# Altium PCB ESP32_FINAL.PcbDoc
Units mil, origin at the board's own origin, x right, y up, seen from the top; angles counter-clockwise.
Board outline 2385 x 3020 mil, 2 copper layers (Top Layer, Bottom Layer); 30 components, 35 nets, 122 pads, 7 vias.
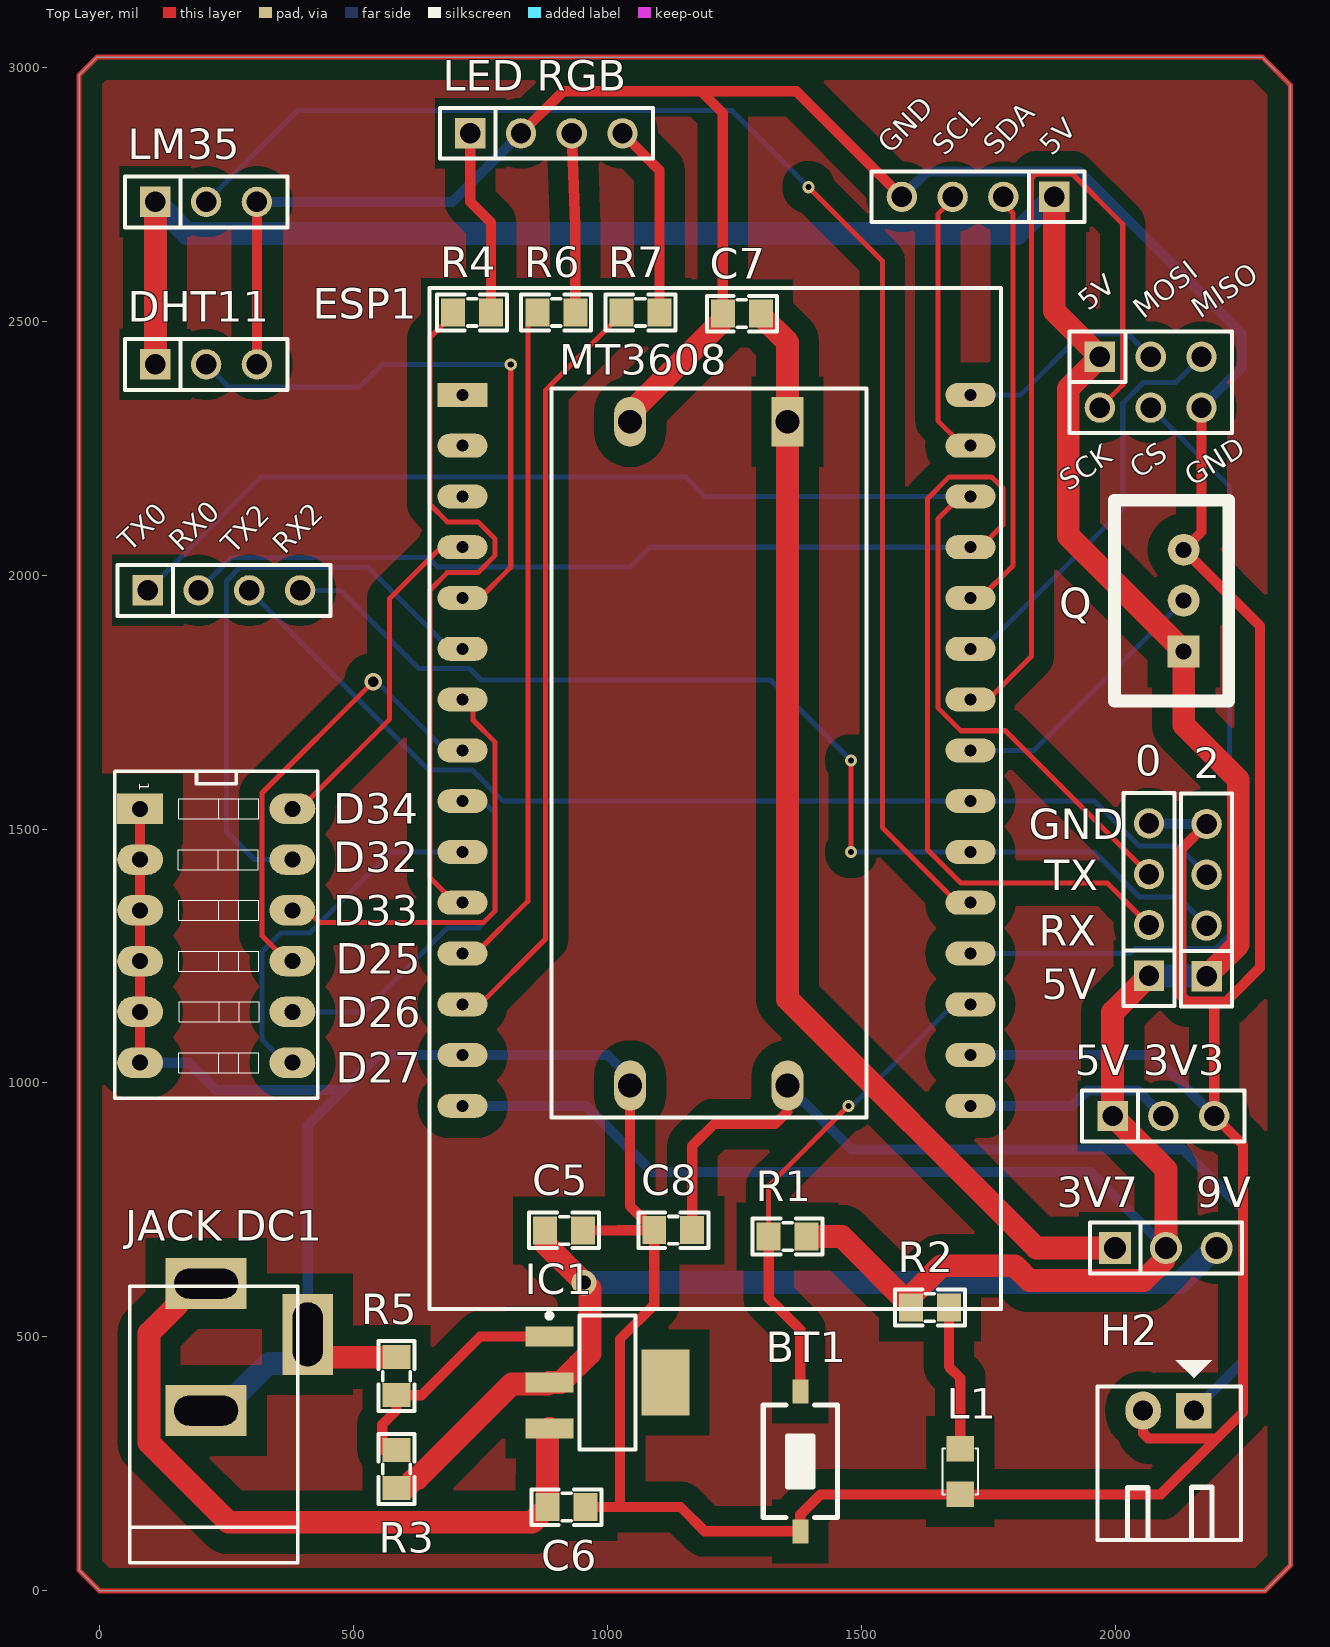
[diagram p0: Top Layer view]
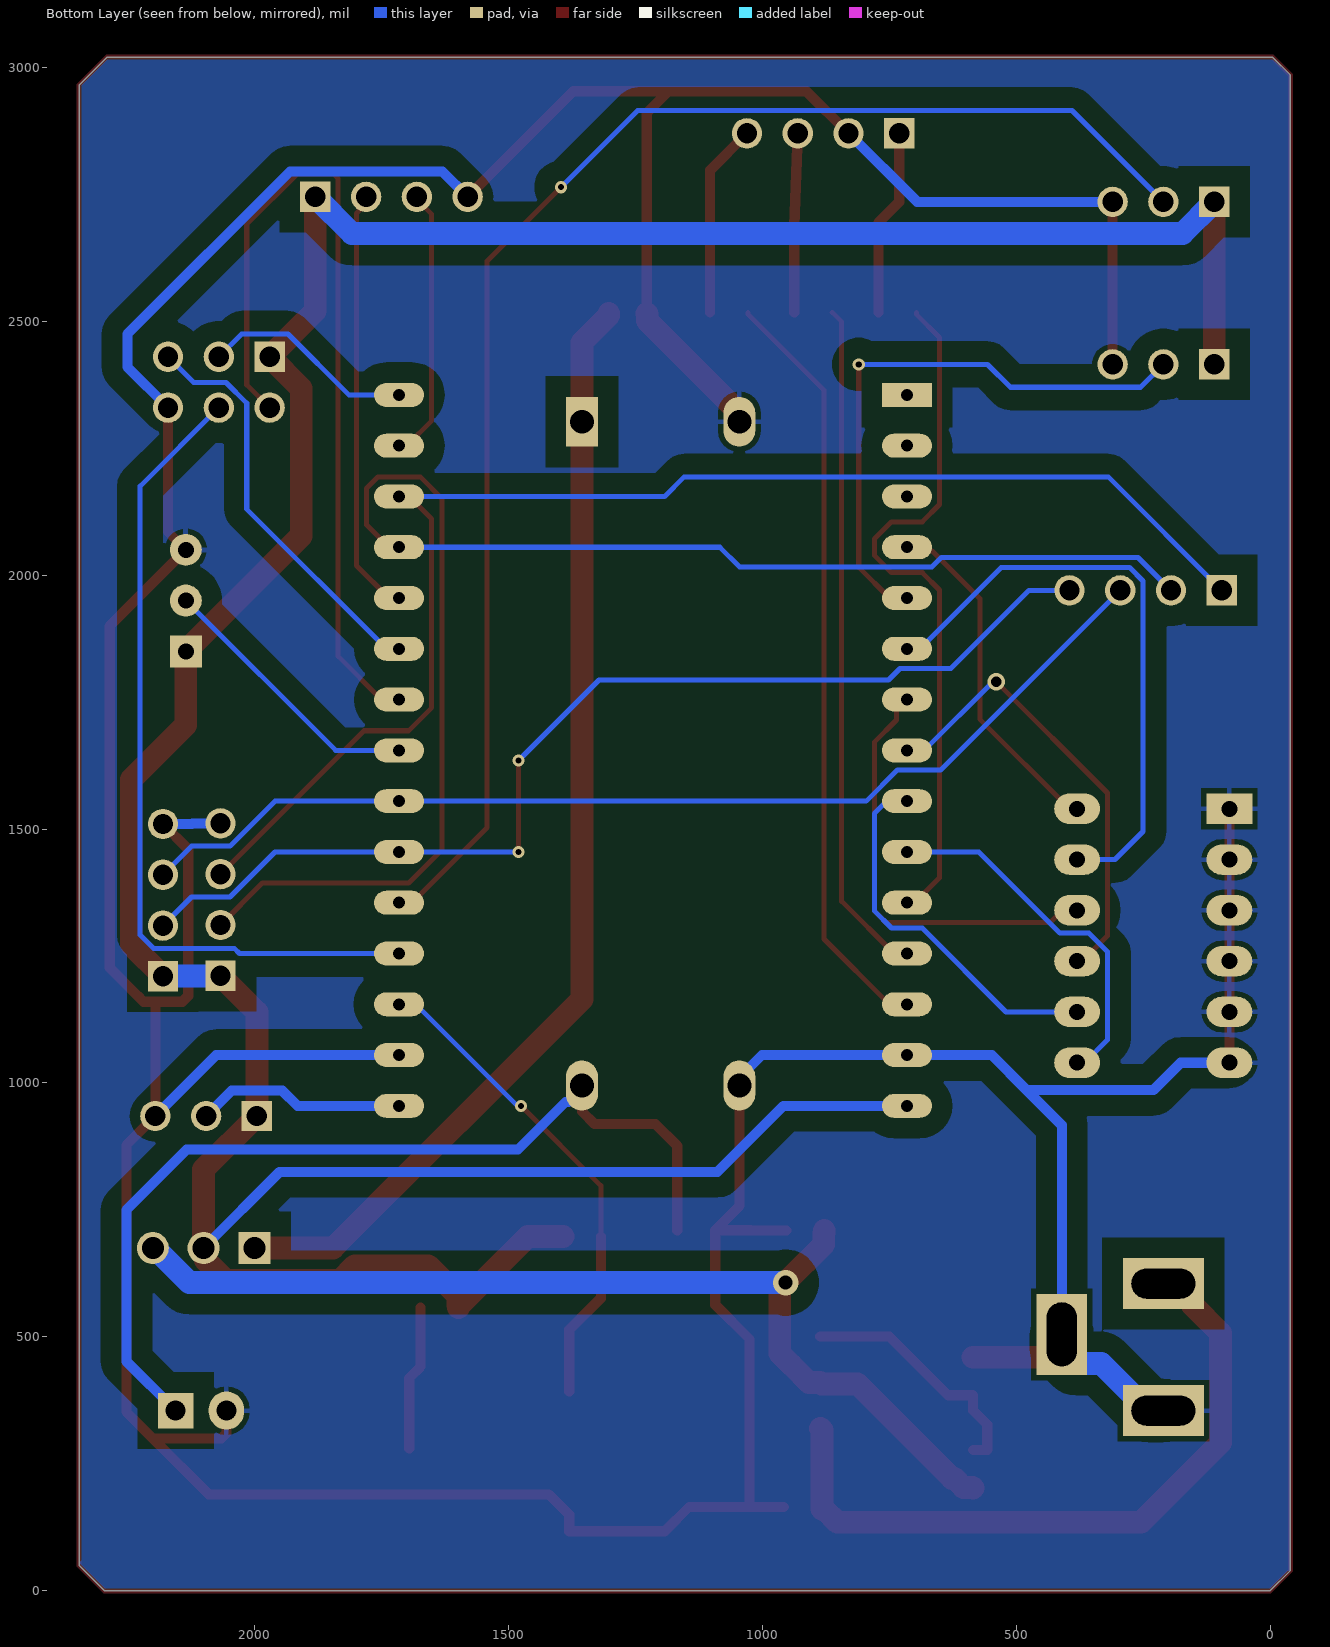
[diagram p1: Bottom Layer view, seen from below]
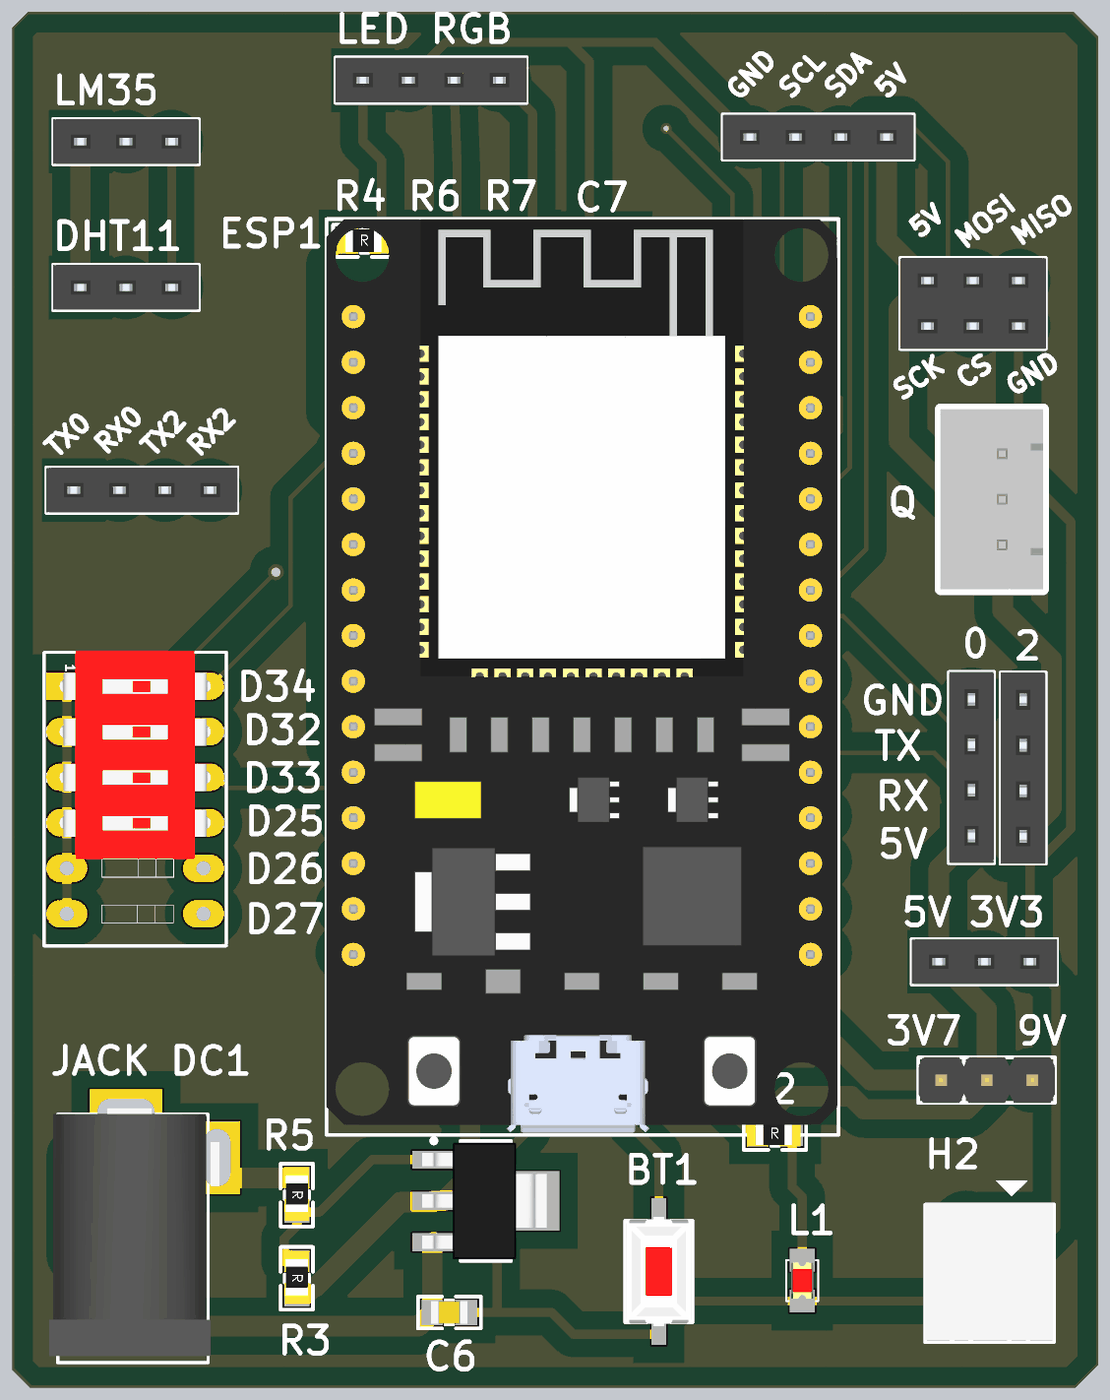
[diagram p2: 3D render of the assembled board from above, using the file's embedded part models]

## Layer stack, top to bottom
Top Solder: solder mask 0.4, Solder Resist, Dk 3.5
Top Layer: signal copper 1.4
Dielectric 1: dielectric 12.6, FR-4, Dk 4.8
Bottom Layer: signal copper 1.4
Bottom Solder: solder mask 0.4, Solder Resist, Dk 3.5

## Board outline
-40,40 0,0 2295,0 2345,50 2345,2965 2290,3020 -5,3020 -40,2985

## Design rules (kind name [scope] priority, off if disabled: settings)
Clearance [All] p1: gap=40 ignorepadtopadclearanceinfootprint=FALSE
PolygonConnect [All] p1: connectstyle=Relief reliefconductorwidth=10 reliefentries=4 polygonreliefangle="90 Angle" airgapwidth=10
RoutingVias [All] p1: holewidth=20 width=35 viastyle="Through Hole" minholewidth=15 minwidth=25 maxholewidth=28 maxwidth=50
SilkToSilkClearance [IsText] p1: silktosilkclearance=10
SolderMaskExpansion [All] p1: expansion=4 istentingtop=FALSE
Width [All] p1: maxlimit=45 minlimit=10 preferedwidth=20
29 further rules are at their usual default settings.

## Classes and differential pairs
component class ESP32_FINAL: 3V7 5V BT1 C5 C6 C7 C8 D34 DHT11 ESP1 GND H2 IC1 "JACK DC1" L1 "LED RGB" MOSI MT3608 Q R1 R2 R3 R4 R5 R6 R7 TX TX0

## Components (designator, comment, footprint, x,y, rotation, side; value= is the part's Value field where it differs from the comment)
3V7 "JP 1x3 2.54" "JP 1x3 DT" 2000,675 r0 top (schematic designator JP8)
5V "JP 1x3 2.54" "JP 1x3 CT" 1995,935 r0 top (schematic designator JP10)
BT1 "Nut Nhan 2 Chan SMD 3x6x2.5" "Nut Nhan 2 Chan SMD 3x6x2.5" 1380,255 r90 top
C5 "105" "tu 0805" 915,710 r0 top
C6 "106" "tu 0805" 920,165 r180 top
C7 "105" "tu 0805" 1265,2515 r180 top
C8 "105" "tu 0805" 1130,710 r180 top
D34 "SW - DIP6" DIP12/W0.3K 80,1540 r270 top value="SW - DIP8" (schematic designator SD1)
DHT11 "JP 1x3 2.54" "JP 1x3 CT" 110,2415 r0 top (schematic designator JP7)
ESP1 "ESP32 DEVKIT" "ESP32 WROOM 32 KIT" 715,2355 r0 top
GND "JP 1x4 2.54" "JP 1x4 CT" 1880,2745 r180 top (schematic designator JP2)
GND "JP 1x4 2.54" "JP 1x4 CT" 2066.65,1211.21 r90 top (schematic designator JP1)
H2 "Header 2P 2.54 Duc Cong" "Header 2P DC 2.54" 2155,355 r270 top
IC1 "LM317" SOT223 1000,410 r270 top
"JACK DC1" "JACK DC 5.5" "JACK DC 5.5" 310,480 r90 top value="Jac DC"
L1 "LED 0805" LED-0805-Red 1695,190 r90 top
"LED RGB" "JP 1x4 2.54" "JP 1x4 CT" 730,2870 r0 top (schematic designator JP9)
LM35 "JP 1x3 2.54" "JP 1x3 CT" 110,2735 r0 top (schematic designator JP4)
MOSI "JP 2x3 2.54" "JP 2x3 CT" 2070,2380 r0 top (schematic designator JP5)
MT3608 "MT3608" "MT3608 - duplicate3" 1355,2302.09 r270 top (schematic designator IC2)
Q "Header 3P 2.54 Duc Thang" XH2.54M-3 2135,1850 r90 top (schematic designator H1)
R1 "10k" "tro smd 0805" 1355,700 r0 top
R2 "680R" "Tro SMD 0805" 1635,560 r0 top
R3 "220R" "tro smd 0805" 587.39,240 r270 top
R4 "220R" "tro smd 0805" 733.66,2520 r0 top
R5 "680R" "Tro SMD 0805" 587.39,422.77 r270 top
R6 "220R" "tro smd 0805" 899.33,2520 r0 top
R7 "220R" "tro smd 0805" 1065,2520 r0 top
TX "JP 1x4 2.54" "JP 1x4 CT" 2180,1210 r90 top (schematic designator JP3)
TX0 "JP 1x4 2.54" "JP 1x4 CT" 95,1970 r0 top (schematic designator JP6)

## Footprints (in the part's own frame and the unit in brackets; to place one, negate y for a bottom-side part, rotate by r counter-clockwise, add the part's x,y. Pads: shape width x height; smd on the part's side, far side on the other; paste and mask are expansions set on the pad)
DIP12/W0.3K [mil] "12 PIN, W 300mil, Pin to pin 100mil For Switch"
  rect 60x90 hole 31.5: 1(0,0)
  oval 60x90 hole 31.5: 2(100,0) 3(200,0) 4(300,0) 5(400,0) 6(500,0) 7(500,300) 8(400,300) 9(300,300) 10(200,300) 11(100,300) 12(0,300)
  silkscreen extent -74,-50 570,350, body extent -78,-45 380,345, height 158
"ESP32 WROOM 32 KIT" [mm]
  rect 2.5x1.2 hole 0.6: 1(0,0)
  oval 2.5x1.2 hole 0.6: 2(0,-2.54) 3(0,-5.08) 4(0,-7.62) 5(0,-10.16) 6(0,-12.7) 7(0,-15.24) 8(0,-17.78) 9(0,-20.32) 10(0,-22.86) 11(0,-25.4) 12(0,-27.94) 13(0,-30.48) 14(0,-33.02) 15(0,-35.56) 16(25.4,-35.56) 17(25.4,-33.02) 18(25.4,-30.48) 19(25.4,-27.94) 20(25.4,-25.4) 21(25.4,-22.86) 22(25.4,-20.32) 23(25.4,-17.78) 24(25.4,-15.24) 25(25.4,-12.7) 26(25.4,-10.16) 27(25.4,-7.62) 28(25.4,-5.08) 29(25.4,-2.54) 30(25.4,0)
  silkscreen extent -1.65,-45.72 26.92,5.33, body extent -1.65,-45.6 26.85,5.33, height 10.49
"Header 2P DC 2.54" [mil]
  rect 70x70 hole 39.37 unplated: 1(0,0)
  oval 75x70 hole 39.37 unplated: 2(0,-100)
  silkscreen extent -100,-190 255,93, body extent -50,-190 250,90, height 237
"JACK DC 5.5" [mil] "Jac DC input"
  rect 100x160 hole 59.06 slot 125.98 at 90 deg: 1(125,100) 2(-125,100)
  rect 160x100 hole 59.06 slot 125.98 at 0 deg: 3(25,-100)
  silkscreen extent -425,-80 120,250, body extent -410,-105 134,269, height 434
"JP 1x3 CT" [mm]
  rect 1.52x1.52 hole 1.02: 1(0,0)
  round 1.52 hole 1.02: 2(2.54,0) 3(5.08,0)
  silkscreen extent -1.52,-1.27 6.6,1.27, body extent -1.52,-1.25 6.6,1.25, height 8.51
"JP 1x3 DT" [mm]
  rect 1.6x1.6 hole 1.1: 1(0,0)
  round 1.6 hole 1.1: 2(2.54,0) 3(5.08,0)
  silkscreen extent -1.27,-1.27 6.35,1.27, body extent -1.27,-1.27 6.35,1.27, height 8.54
"JP 1x4 CT" [mm]
  rect 1.52x1.52 hole 1.02: 1(0,0)
  round 1.52 hole 1.02: 2(2.54,0) 3(5.08,0) 4(7.62,0)
  silkscreen extent -1.52,-1.27 9.14,1.27, body extent -1.52,-1.25 9.14,1.25, height 8.51
"JP 2x3 CT" [mm]
  rect 1.52x1.52 hole 1.02: 1(-2.54,1.27)
  round 1.52 hole 1.02: 2(0,1.27) 3(2.54,1.27) 4(2.54,-1.27) 5(0,-1.27) 6(-2.54,-1.27)
  silkscreen extent -4.06,-2.54 4.06,2.54, body extent -4.06,-2.54 4.06,2.54, height 8.51
LED-0805-Red [mil]
  rect 50x55 smd: 1(0,0) 2(90,0)
  silkscreen extent 0,-35 90,35, body extent 5,-25 85,25, height 43
"MT3608 - duplicate3" [mm]
  rect 2.5x1.6 hole 1.2: 1(0,0)
  oval 2.5x1.6 hole 1.2: 2(0,-7.874) 3(33.2,-7.874) 4(33.2,0)
  silkscreen extent -1.65,-11.81 34.8,3.94
"Nut Nhan 2 Chan SMD 3x6x2.5" [mm] "Switch SMD type"
  rect 1.2x0.8 smd: 1(-3.5,0) 2(3.5,0)
  silkscreen extent -2.82,-1.85 2.82,1.85, body extent -3.05,-1.85 3.05,1.85, height 2.5
SOT223 [mm]
  rect 1x2.4 smd: 1(-2.3,-2.9) 2(0,-2.9) 3(2.3,-2.9)
  rect 3.3x2.4 smd: 4(0,2.9)
  silkscreen extent -3.47,-3.02 3.35,1.4, body extent -3.25,-3.56 3.25,3.4, height 1.68
"tro smd 0805" [mm]
  rect 1.2x1.4 smd: 1(-0.946,-0.061) 2(0.954,-0.061)
  silkscreen extent -1.75,-0.97 1.75,0.84, body extent -1.56,-0.76 1.44,0.64, height 0.53
"Tro SMD 0805" [mm]
  rect 1.2x1.4 smd: 1(-0.946,-0.061) 2(0.954,-0.061)
  silkscreen extent -1.75,-0.97 1.75,0.84, body extent -1.56,-0.76 1.44,0.64, height 0.53
"tu 0805" [mm] "Compoment SMD 80x50mil"
  rect 1.2x1.4 smd: 1(-0.946,-0.003) 2(0.954,-0.003)
  silkscreen extent -1.75,-0.89 1.75,0.89, body extent -1.01,-0.64 1.01,0.63, height 0.61
XH2.54M-3 [mm]
  rect 1.6x1.6 hole 0.8: 1(0,0)
  round 1.6 hole 0.8: 2(2.54,0) 3(5.08,0)
  silkscreen extent -2.48,-2.26 7.56,3.46, body extent -2.48,-2.26 7.56,3.48, height 6.91

## Part data
3V7: library part "JP 1x3 2.54 Duc Thang", "Cắm", Chung_Loai=Cắm, Don_Vi=Con, Ma_Hang=MH000903, Ten_Linh_Kien="Jump Đơn Đực 2.54MM 1x40P Thẳng 11MM"
5V DHT11 LM35: library part "JP 1x3 2.54 Cai Thang", "Cắm", Chung_Loai=Cắm, Don_Vi=Con, Ma_Hang=MH004006, Ten_Linh_Kien="Jump Đơn Cái 2.54MM 1x20P Thẳng"
C5 C7 C8: library part "Tu 0805 105 50V 10%", "Dán", Chung_Loai=Dán, Don_Vi=Con, Ma_Hang=MH004552, So_Chan=2, Ten_Linh_Kien="Tụ 0805 105-1uF 10% 50V"
C6: library part "Tu 0805 106 16V 10%", "Dán", Chung_Loai=Dán, Don_Vi=Con, Ma_Hang=MH004553, So_Chan=2, Ten_Linh_Kien="Tụ 0805 106-10uF 10% 16V"
D34: library part SWDIP-6, "DIP Switch, 6 Position, SPST"
ESP1: library part "ESP32 WROOM 32 KIT"
GND GND "LED RGB" TX TX0: library part "JP 1x4 2.54 Cai Thang", "Cắm", Chung_Loai=Cắm, Don_Vi=Con, Ma_Hang=MH004006, Ten_Linh_Kien="Jump Đơn Cái 2.54MM 1x20P Thẳng"
H2 Q: "Cắm", Chung_Loai=Cắm, Don_Vi=Con
  H2: Ma_Hang=MH002852, Ten_Linh_Kien="Header 2P XH2.54-2P Đực Cong"
  Q: Ma_Hang=MH001292, Ten_Linh_Kien="Header 3P XH2.54-3P Đực Thẳng"
IC1: library part "LM317 TO223 SMD", "Dán", Chung_Loai=Dán, Don_Vi=Con, Ma_Hang=MH003617, Ten_Linh_Kien="LM317 TO223 ADJ 0.5A (N07A,N01A)"
L1: library part "LED 0805 Do", "Dán", Chung_Loai=Dán, Don_Vi=Con, Ma_Hang=MH000897, Ten_Linh_Kien="LED 0805 Màu Đỏ (Red)"
MOSI: library part "JP 2x3 2.54 Cai Thang", "Cắm", Chung_Loai=Cắm, Don_Vi=Con, Ma_Hang=MH008647, Ten_Linh_Kien="Jump Đôi Cái 2.54MM 2x20P Thẳng"
MT3608: library part MT3608_V2, "2A DC-DC BOOST", ComponentLink1Description="New link"
R1: library part "Tro 0805 1% 10k", "Dán", Chung_Loai=Dán, Don_Vi=Con, Ma_Hang=MH005473, So_Chan=2, Ten_Linh_Kien="Trở 0805 1% 10k"
R2 R5: library part "Tro 0805 5% 680R", "Dán", Chung_Loai=Dán, Don_Vi=Con, Ma_Hang=MH005344, So_Chan=2, Ten_Linh_Kien="Trở 0805 5% 680R"
R3 R4 R6 R7: library part "Tro 0805 5% 220R", "Dán", Chung_Loai=Dán, Don_Vi=Con, Ma_Hang=MH005259, So_Chan=2, Ten_Linh_Kien="Trở 0805 5% 220R"
BT1: Ma_Hang=MH001036, Ten="Nút Nhấn 2 Chân 3x6x2.5MM SMD"

## Via types
v1: diameter 24, hole 12, Top Layer to Bottom Layer, tented both sides, 5 vias
v2: diameter 50, hole 28, Top Layer to Bottom Layer, tented both sides, 1 vias
v3: diameter 35, hole 20, Top Layer to Bottom Layer, tented both sides, 1 vias

## Nets (pads, with @x,y where several pads share a name; then routed paths per layer and width w, separated by ;. In a path a pad name is that pad's centre, name@x,y a point inside that pad or via, vN(x,y) a via of type N, cw(c..) or ccw(c..) an arc to the next point about the centre after c; other vN are vias at no path point)
3V3: 5V.2 ESP1.16 | length 413.1
  Bottom Layer w20: ESP1.16 1915,955 1945,985 2045,985 5V.2
3V7: C8.1 H2.1 MT3608.4 | length 1870.2
  Top Layer w20: C8.1 1167.23,876.23 1210,919 1330,919 1355,944 MT3608.4
  Bottom Layer w20: MT3608.4 1355,988.92 1381.26,962.66 1387.34,962.66 1481,869 2133,869 2252,750 2252,452 H2.1
5V: 3V7.2 5V.1 DHT11.1 ESP1.15 GND.1 LM35.1 MOSI.1 Q.1 R1.2 R2.1 TX.1 | length 6994
  Top Layer w45: DHT11.1 LM35.1 ; R1.2 1461.71,697.61 R2.1@1597.77,561.54 ; R2.1 R2.1@1597.77,561.54 ; GND.1@1880,2745 1880,2520 MOSI.1 1907.58,2367.58 1907.58,2077.42 Q.1 2135,1705 2242.42,1597.58 2242.42,1272.42 TX.1 ; GND.1@2066.65,1211.21 1995,1139.57 5V.1 2100,830 3V7.2 2096.56,671.56 2096.56,651.56 2056,611 1831.21,611 1802.22,640 1657.82,640 1598.89,581.07 1598.89,562.67 R2.1@1597.77,561.54
  Bottom Layer w20: ESP1.15 958,955 1088,825 1950,825 3V7.2
  Bottom Layer w45: LM35.1 172.42,2672.58 1807.58,2672.58 GND.1@1880,2745 ; GND.1@2066.65,1211.21 2067.25,1210.61 2179.39,1210.61 TX.1
5V(3V7): 3V7.1 C7.1 MT3608.1 | length 2220
  Top Layer w45: C7.1 1302.23,2511.2 1355,2458.43 MT3608.1 1355,1165 1845,675 3V7.1
5V(9): 3V7.3 C5.1 IC1.2 R3.2 | length 2043.3
  Top Layer w45: R3.2 586.12,203.55 603.55,203.55 621.11,221.11 626.02,221.11 812.1,407.19 883.01,407.19 IC1.2 907.76,410 942.39,444.63 942.8,444.63 965.57,467.41 965.57,595.43 v2(954,607) 878.89,682.11 878.89,704.81 877.77,705.93 C5.1
  Bottom Layer w45: v2(954,607) 2128,607 2196,675 3V7.3
D2_CS: ESP1.19 MOSI.5 | length 1627.8
  Bottom Layer w10: ESP1.19 2029.38,1255 2039.45,1265.08 2198.61,1265.08 2224.92,1291.39 2224.92,2175.08 MOSI.5
D4_LM35: ESP1.20 LM35.2 | length 2879.2
  Top Layer w10: v1(1396,2764) 1541.53,2618.47 1541.53,1502.88 1689.41,1355 ESP1.20
  Bottom Layer w10: LM35.2 389.92,2914.92 1245.08,2914.92 v1(1396,2764)
D5_Q: ESP1.23 Q.2 | length 542.2
  Bottom Layer w10: ESP1.23 1840,1655 Q.2
D12_G: ESP1.12 R6.1 | length 1338.5
  Top Layer w10: ESP1.12 740.59,1255 843.48,1357.89 843.48,2498.98 R6.1
D13_B: ESP1.13 R7.1 | length 1512.7
  Top Layer w10: ESP1.13 750,1155 878.43,1283.43 878.43,2364.33 1027.77,2513.67 R7.1
D14_R: ESP1.11 R4.1 | length 1394.4
  Top Layer w10: R4.1 696.43,2513.67 650.79,2468.02 650.79,2139 684.79,2105 745.21,2105 779.21,2071 779.21,2039 745.21,2005 684.79,2005 650.79,1971 650.79,1404.21 677.39,1377.61 677.39,1377.09 699.49,1355 ESP1.11
D15_BT: BT1.2 ESP1.18 R1.1 | length 975.9
  Top Layer w10: R1.1 1317.77,797.77 v1(1475,955)
  Top Layer w20: R1.1 1317.77,576.23 1380,514 BT1.2
  Bottom Layer w10: v1(1475,955) 1482.2,955 1682.2,1155 ESP1.18
D18_SCK: ESP1.24 MOSI.6 | length 1700.5
  Top Layer w10: ESP1.24 1750,1755 1835.08,1840.08 1835.08,2781.13 1843.87,2789.92 1916.13,2789.92 2014.92,2691.13 2014.92,2374.92 MOSI.6
D19_MISO: ESP1.25 MOSI.3 | length 815.3
  Bottom Layer w10: ESP1.25 1740,1855 2014.92,2129.92 2014.92,2338.45 2055.93,2379.46 2119.46,2379.46 MOSI.3
D21(SDA): ESP1.26 GND.2@1780,2745 | length 844.6
  Top Layer w10: ESP1.26 1735,1955 1799.21,2019.21 1799.21,2712.3 1780,2731.51 GND.2@1780,2745
D22(SCL): ESP1.29 GND.3@1680,2745 | length 537.8
  Top Layer w10: GND.3@1680,2745 1680,2739.9 1650.79,2710.68 1650.79,2304.21 1677.39,2277.61 1677.39,2277.09 1699.49,2255 ESP1.29
D23_MOSI: ESP1.30 MOSI.2 | length 423.3
  Bottom Layer w10: ESP1.30 1813.94,2355 1933.87,2474.92 2025.08,2474.92 MOSI.2
D35_DHT11: DHT11.2 ESP1.5 | length 1156.5
  Top Layer w10: ESP1.5 749.36,1955 809.86,2015.5 v1(809.86,2415)
  Bottom Layer w10: DHT11.2 254.92,2370.08 511.26,2370.08 556.18,2415 v1(809.86,2415)
GND: 5V.3 "JACK DC1.2" "JACK DC1.3" "LED RGB.2" BT1.1 C5.2 C6.1 C7.2 C8.2 D34.1 D34.2 D34.3 D34.4 D34.5 D34.6 DHT11.3 ESP1.14 ESP1.17 GND.4 H2.2 L1.1 LM35.3 MOSI.4 MT3608.2 MT3608.3 Q.3 R5.1 TX.4 | length 11899
  Top Layer w20: D34.6 D34.5 D34.4 D34.3 D34.2 D34.1 ; DHT11.3 LM35.3 ; 830,2870 913,2953 1184.43,2953 ; C5.2 1022,709.87 1022.27,710.13 C8.2 ; C6.1 1025,165.13 ; MT3608.3 1045,757.56 C8.2 ; C7.2 1227.43,2910 1184.43,2953 ; GND.4@1580,2745 1372,2953 1184.43,2953 ; H2.2 2055,310 2065,300 2200,300 ; MOSI.4 2170,2085 Q.3 2284.92,1900.08 2284.92,1226.72 2230,1171.79 ; TX.4 2130.08,1460.08 2130.08,1171.79 2141.79,1160.08 2195,1160.08 ; 2229.92,1171.79 2218.21,1160.08 2195,1160.08 ; 1025,165.13 1144,165.13 1191.93,117.2 BT1.1 1380,150 1420,190 L1.1 2090,190 2200,300 ; 1025,165.13 1025,496 1092.43,563.43 C8.2 ; 2195,1160.08 5V.3 2252,878 2252,352 2200,300
  Top Layer w45: 410,505 410,487.5 437.5,460 R5.1 ; MT3608.2 1045,2319.8 1226.3,2501.11 1226.3,2514.01 C7.2
  Bottom Layer w20: D34.6 176,1040 230,986 479,986 ; LM35.3 695,2735 830,2870 ; 410,505 410,917 479,986 ; MT3608.3 1045,1010.32 1000.32,1055 ESP1.14 548,1055 479,986 ; GND.4@1580,2745 1630,2795 1930,2795 2250,2475 2250,2410 MOSI.4 ; ESP1.17 2075,1055 5V.3 ; GND.4@2066.65,1511.21 2122,1511.21 2123.21,1510 TX.4
  Bottom Layer w45: 210,355 240,355 332.5,447.5 382.5,447.5 410,475 410,505
MCU_D25: D34.9 ESP1.8 | length 903.3
  Top Layer w10: D34.9 370,1240 320,1290 320,1571 v3(539,1790)
  Bottom Layer w10: v3(539,1790) 545.76,1790 680.76,1655 ESP1.8
MCU_D26: D34.8 ESP1.9 | length 747.7
  Bottom Layer w10: D34.8 519.79,1140 684.79,1305 745.21,1305 779.21,1339 779.21,1530.79 762.13,1547.87 722.13,1547.87 ESP1.9
MCU_D27: D34.7 ESP1.10 | length 728.6
  Bottom Layer w10: D34.7 365,1040 320,1085 320,1258.64 356.36,1295 413.64,1295 573.64,1455 ESP1.10
MCU_D32: D34.11 ESP1.6 | length 1188.4
  Bottom Layer w10: D34.11 305.08,1440 250.08,1495 250.08,1988.61 276.39,2014.92 529.49,2014.92 689.41,1855 ESP1.6
MCU_D33: D34.10 ESP1.7 | length 862.9
  Top Layer w10: D34.10 408.53,1340 432.15,1316.38 756.59,1316.38 779.21,1339 779.21,1671 735.59,1714.62 735.59,1737.8 718.39,1755 ESP1.7
MCU_D34: D34.12 ESP1.4 | length 687.4
  Top Layer w10: D34.12 395,1540 571.5,1716.5 571.5,1953.86 665.52,2047.87 707.87,2047.87 ESP1.4
MCU_RX0: ESP1.27 GND.2@2066.65,1311.21 TX0.2 | length 3089.4
  Top Layer w10: ESP1.27 1735,2055 1779.21,2099.21 1779.21,2171 1756.59,2193.62 1673.41,2193.62 1630.79,2151 1630.79,1459 1696.17,1393.62 1984.24,1393.62 GND.2@2066.65,1311.21
  Bottom Layer w10: TX0.2 259.92,2034.92 647.24,2034.92 665.79,2016.38 1044.92,2016.38 1083.54,2055 ESP1.27
MCU_RX2: ESP1.21 TX0.4 TX.2 | length 2163.8
  Top Layer w10: v1(1480,1455) v1(1480,1635)
  Bottom Layer w10: TX0.4 475,1970 628.62,1816.38 728.62,1816.38 751.38,1793.62 1321.38,1793.62 v1(1480,1635) ; v1(1480,1455) ESP1.21 1959.33,1455 2048.04,1366.29 2123.71,1366.29 TX.2
MCU_TX0: ESP1.28 GND.3@2066.65,1411.21 TX0.1 | length 2734.6
  Top Layer w10: ESP1.28 1695,2155 1650.79,2110.79 1650.79,1739 1696.17,1693.62 1784.24,1693.62 GND.3@2066.65,1411.21
  Bottom Layer w10: TX0.1 318.62,2193.62 1153.5,2193.62 1192.12,2155 ESP1.28
MCU_TX2: ESP1.22 TX0.3 TX.3 | length 2117
  Bottom Layer w10: TX0.3 648.62,1616.38 733.83,1616.38 795.21,1555 ESP1.22 1959.33,1555 2048.04,1466.29 2123.71,1466.29 TX.3
NetIC1_1: IC1.1 R3.1 R5.2 | length 496.2
  Top Layer w20: R3.1 556.97,277.23 556.97,327.4 585,355.43 R5.2 634,385.2 749.36,500.55 IC1.1
NetJP9_1: "LED RGB.1" R4.2 | length 369.5
  Top Layer w20: 730,2870 730,2735.24 771.24,2694 R4.2
NetJP9_3: "LED RGB.3" R6.2 | length 352.5
  Top Layer w20: 930,2870 936.91,2687.09 R6.2
NetJP9_4: "LED RGB.4" R7.2 | length 382.5
  Top Layer w20: 1030,2870 1102.57,2797.43 R7.2
NetL1_2: L1.2 R2.2 | length 286.9
  Top Layer w20: R2.2 1672.57,441.43 1695,419 L1.2
Vin: "JACK DC1.1" C6.2 IC1.3 | length 1398.3
  Top Layer w45: 210,605 180,605 152.5,577.5 152.5,562.5 97.5,507.5 97.5,291.54 254.04,135 852.29,135 877.37,160.07 881.3,160.07 882.43,161.2 C6.2 882.43,316.63 885.24,319.45 IC1.3
pads on no net: ESP1.1 ESP1.2 ESP1.3 IC1.4
copper on no net: | length 10704.6
  Top Layer w10: -40,40 0,0 2295,0 2345,50 2345,2965 2290,3020 -5,3020 -40,2985 -40,40

## Polygon pours and split planes (outlines as drawn)
GND on Bottom Layer "GND_L02_P000" (solid, remove dead copper, pour order 0): -5,3015 2290,3015 2340,2965 2340,60 2345,55 2295,5 0,5 -35,40 -40,40 -40,2985
no net on Top Layer "NONET_L01_P001" (solid, pour order 1): -5,3020 2290,3020 2345,2965 2345,50 2295,0 0,0 -40,40 -40,2985

## Silkscreen, mask and mechanical layers (free items; w line width, h text height)
Top Overlay:
  text "SCL" at 1664.67,2824.14 h40 r46.33
  text "SDA" at 1764.66,2824.14 h40 r46.4
  text "5V" at 1875,2824.14 h40 r45
  text "5V" at 1946.56,2519.06 h40 r38.66
  text "MISO" at 2167.65,2503.89 h40 r34.22
  text "CS" at 2047.15,2188.98 h40 r36.25
  text "GND" at 2153.28,2173.76 h40 r31.61
  text "SCK" at 1907.49,2163.92 h40 r34.88
  text "RX0" at 160.29,2044.14 h40 r43.83
  text "TX2" at 264.72,2039.14 h40 r46.12
  text "RX2" at 365,2039.14 h40 r45
  text "0" at 2040,1605 h60
  text "2" at 2155,1600 h60
  text "D32" at 460,1415 h60
  text "D33" at 460,1310 h60
  text "RX" at 1850,1270 h60
  text "D25" at 465,1215 h60
  text "5V" at 1855,1165 h60
  text "D26" at 465,1110 h60
  text "3V3" at 2055,1015 h60
  text "D27" at 465,1000 h60
  text "9V" at 2160,755 h60
Bottom Overlay:

## Text inside footprints (layer, text, board x,y; h text height)
D34: Top Overlay "1" at 78,1592 h20 r270